# EAGLE board Incredible Esboo (EAGLE 9.7.0)

Size 543.38 x 342.44 mm. Coordinates in mm from the lower left corner, seen from the top.
Outline: 0,0 543.38,0 543.38,342.44 0,342.44 0,0
Copper layers (1*16): Top 0.035mm / dielectric 1.5mm / Bottom 0.035mm
Design rules "default": minimum track width 6mil, minimum drill 0.35mm, track to track 6mil, track to pad 6mil, pad to pad 6mil, via to via 6mil, smd to smd 6mil, copper to edge 40mil, drill to drill 6mil, minimum pad ring 10mil, minimum via ring 8mil, stop-mask expansion 4mil, vias tented up to drill 0mil, thermal gap 10mil

## Footprints (pad centres in the part's own frame; a part is rotated, then mirrored left to right if it is on the bottom)
BATTERY-GENERIC = drill 1.118 pad 3.15 octagon: + 2.54,0; - -2.54,0
1X08 = drill 1.016 long: 1 -8.89,0; 2 -6.35,0; 3 -3.81,0; 4 -1.27,0; 5 1.27,0; 6 3.81,0; 7 6.35,0; 8 8.89,0
1X02 = drill 1.016 long: 1 -1.27,0; 2 1.27,0
RESAD1016W63L850D250B = drill 0.83 pad 1.43: 1 -5.08,0; 2 5.08,0
78F01T = drill 0.8: 1 -1.27,-3.81; 2 1.27,-3.81; 3 1.27,3.81; 4 -1.27,3.81

## Placement (x,y rotation side)
BAT1  9V  [BATTERY-GENERIC]  124.49,158.66 90 top
BAT2  9V  [BATTERY-GENERIC]  229.32,152.57 270 top
BAT3  9V  [BATTERY-GENERIC]  235.9,65.48 270 top
BAT4  9V  [BATTERY-GENERIC]  61.18,8.26 270 top
BAT5  9V  [BATTERY-GENERIC]  476.35,51.1 270 top
BAT6  9V  [BATTERY-GENERIC]  110.78,233.57 90 top
BAT7  9V  [BATTERY-GENERIC]  535.12,227.95 270 top
JP1  PINHD-1X08_1X08M  [1X08]  147.77,233.51 270 top
L1  LIGHTBULB  [1X02]  204.03,171.56 0 top
L2  LIGHTBULB  [1X02]  203.92,95.26 0 top
L3  LIGHTBULB  [1X02]  7.03,67.15 0 top
L4  LIGHTBULB  [1X02]  59.36,67.15 0 top
L5  LIGHTBULB  [1X02]  509.83,119.88 0 top
L6  LIGHTBULB  [1X02]  509.24,158.68 0 top
L7  LIGHTBULB  [1X02]  424.52,336.17 0 top
L8  LIGHTBULB  [1X02]  511.79,336.04 0 top
L9  LIGHTBULB  [1X02]  533.09,305.13 0 top
R2  1k  [RESAD1016W63L850D250B]  423.96,280.33 90 top
R3  1k  [RESAD1016W63L850D250B]  470.44,335.76 0 top
R4  1k  [RESAD1016W63L850D250B]  513.01,309.99 90 top
SW1  DPST78F01T  [78F01T]  201.44,67.17 0 top
SW3  DPST78F01T  [78F01T]  6.99,10.28 0 top
SW4  DPST78F01T  [78F01T]  459.78,90.86 0 top
SW5  DPST78F01T  [78F01T]  425.83,230.21 0 top

## Library data of the parts
BAT1-BAT7 JP1 L1-L9 R2-R4 SW1 SW3-SW5 = Tinkercad

## Nets
BAT1+: BAT1.+ BAT1.-
BAT2+: BAT2.+ L1.1
BAT2-: BAT2.- L1.2
BAT3+: BAT3.+ SW1.2
BAT3-: BAT3.- L2.2
BAT4+: BAT4.+ SW3.1
BAT4-: BAT4.- L4.2
BAT5+: BAT5.+ SW4.1
BAT5-: BAT5.- SW4.2
BAT6+: BAT6.+ JP1.4
BAT6-: BAT6.- JP1.5
BAT7+: BAT7.+ SW5.1
BAT7-: BAT7.- L9.2
L3_2: L3.2 L4.1
L5_2: L5.2 L6.1
L7_1: L7.1 R2.2
L7_2: L7.2 R3.1
L8_1: L8.1 R3.2
L8_2: L8.2 R4.2
L9_1: L9.1 R4.1
SW1_3: L2.1 SW1.3
SW3_4: L3.1 SW3.4
SW4_3: L6.2 SW4.3
SW4_4: L5.1 SW4.4
SW5_4: R2.1 SW5.4

## Tracks (layer width: path | path; a pad name or v marks a point on that pad's centre or on a via)
BAT1+  (1 unrouted)
BAT2+  (1 unrouted)
BAT2-  (1 unrouted)
BAT3+  (1 unrouted)
BAT3-  (1 unrouted)
BAT4+  (1 unrouted)
BAT4-  (1 unrouted)
BAT5+  (1 unrouted)
BAT5-  (1 unrouted)
BAT6+  (1 unrouted)
BAT6-  (1 unrouted)
BAT7+  (1 unrouted)
BAT7-  (1 unrouted)
L3_2  (1 unrouted)
L5_2  (1 unrouted)
L7_1  (1 unrouted)
L7_2  (1 unrouted)
L8_1  (1 unrouted)
L8_2  (1 unrouted)
L9_1  (1 unrouted)
SW1_3  (1 unrouted)
SW3_4  (1 unrouted)
SW4_3  (1 unrouted)
SW4_4  (1 unrouted)
SW5_4  (1 unrouted)